# Altium PCB PCB1.PcbDoc (part 4 of 6)
Units mm, origin at the board's own origin, x right, y up, seen from the top; angles counter-clockwise.
Board outline 1473.2 x 504.06 mm, 4 copper layers (Top Layer, MidLayer1, MidLayer2, Bottom Layer); 162 components, 222 nets, 4894 pads, 2213 vias.
Unrouted connection lines stored in the file: 216.
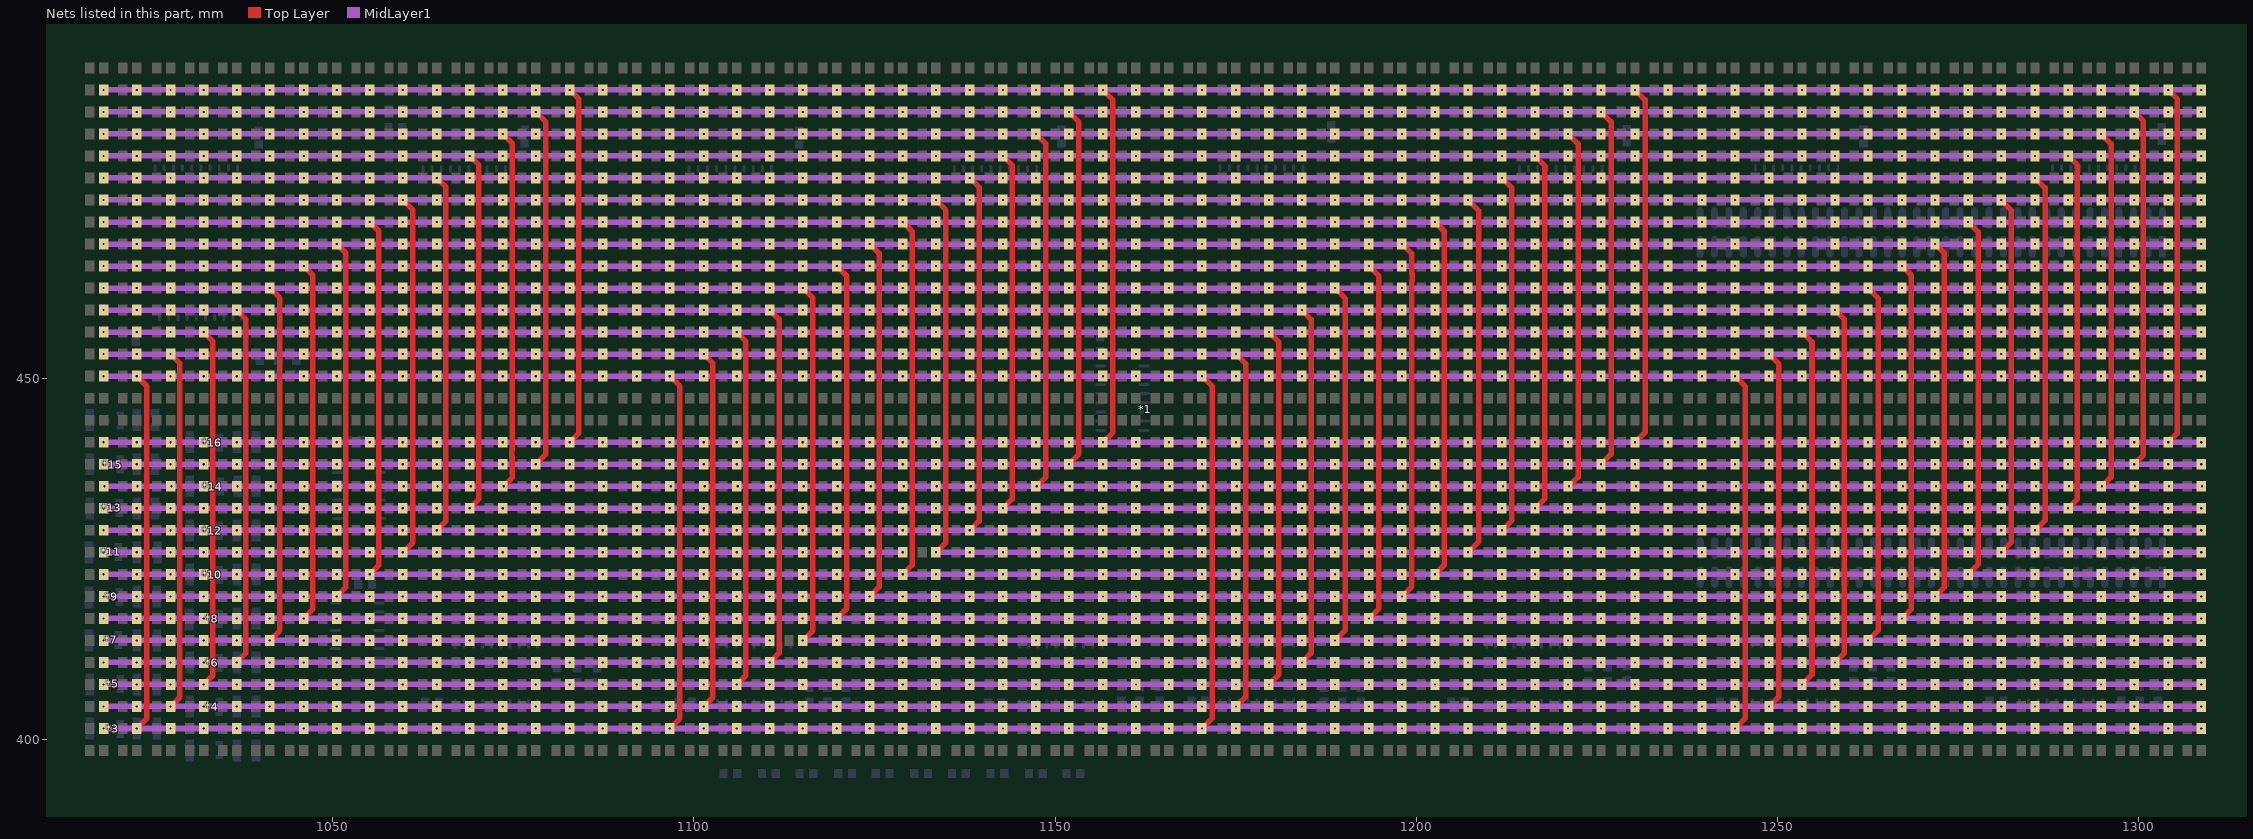
[diagram p6: the nets of this part, all layers, seen from the top]

## Via types
v1: diameter 0.508, hole 0.305, Top Layer to MidLayer1, 2032 vias
v2: diameter 0.508, hole 0.305, Top Layer to Bottom Layer, 143 vias
v3: diameter 0.508, hole 0.305, MidLayer2 to Bottom Layer, 38 vias

## Nets (pads, with @x,y where several pads share a name; then routed paths per layer and width w, separated by ;. In a path a pad name is that pad's centre, name@x,y a point inside that pad or via, vN(x,y) a via of type N, cw(c..) or ccw(c..) an arc to the next point about the centre after c; other vN are vias at no path point) (continued)
AOD1: *1.66 *3.1 | length 780.3
  Top Layer w0.762: v1(1022.863,401.574) 1024.255,402.966 1024.255,448.95 v1(1022.863,450.342) ; v1(1096.65,401.574) 1098.042,402.966 1098.042,448.95 v1(1096.65,450.342) ; v1(1170.31,401.574) 1171.702,402.966 1171.702,448.95 v1(1170.31,450.342) ; v1(1244.097,401.574) 1245.489,402.966 1245.489,448.95 v1(1244.097,450.342)
  MidLayer1 w0.762: v2(1018.286,401.574) v1(1022.863,401.574) v1(1027.562,401.574) v1(1032.134,401.574) v1(1036.701,401.574) v1(1041.278,401.574) v1(1045.977,401.574) v1(1050.549,401.574) v1(1055.116,401.574) v1(1059.693,401.574) v1(1064.392,401.574) v1(1068.964,401.574) v1(1073.531,401.574) v1(1078.108,401.574) v1(1082.807,401.574) v1(1087.379,401.574) v1(1092.073,401.574) v1(1096.65,401.574) v1(1101.349,401.574) v1(1105.921,401.574) v1(1110.488,401.574) v1(1115.065,401.574) v1(1119.764,401.574) v1(1124.336,401.574) v1(1128.903,401.574) v1(1133.48,401.574) v1(1138.179,401.574) v1(1142.751,401.574) v1(1147.318,401.574) v1(1151.895,401.574) v1(1156.594,401.574) v1(1161.166,401.574) v1(1165.733,401.574) v1(1170.31,401.574) v1(1175.009,401.574) v1(1179.581,401.574) v1(1184.148,401.574) v1(1188.725,401.574) v1(1193.424,401.574) v1(1197.996,401.574) v1(1202.563,401.574) v1(1207.14,401.574) v1(1211.839,401.574) v1(1216.411,401.574) v1(1220.978,401.574) v1(1225.555,401.574) v1(1230.254,401.574) v1(1234.826,401.574) v1(1239.52,401.574) v1(1244.097,401.574) v1(1248.796,401.574) v1(1253.368,401.574) v1(1257.935,401.574) v1(1262.512,401.574) v1(1267.211,401.574) v1(1271.783,401.574) v1(1276.35,401.574) v1(1280.927,401.574) v1(1285.626,401.574) v1(1290.198,401.574) v1(1294.765,401.574) v1(1299.342,401.574) v1(1304.041,401.574) v1(1308.613,401.574) ; v1(1018.286,450.342) v1(1022.863,450.342) v1(1027.562,450.342) v1(1032.134,450.342) v1(1036.701,450.342) v1(1041.278,450.342) v1(1045.977,450.342) v1(1050.549,450.342) v1(1055.116,450.342) v1(1059.693,450.342) v1(1064.392,450.342) v1(1068.964,450.342) v1(1073.531,450.342) v1(1078.108,450.342) v1(1082.807,450.342) v1(1087.379,450.342) v1(1092.073,450.342) v1(1096.65,450.342) v1(1101.349,450.342) v1(1105.921,450.342) v1(1110.488,450.342) v1(1115.065,450.342) v1(1119.764,450.342) v1(1124.336,450.342) v1(1128.903,450.342) v1(1133.48,450.342) v1(1138.179,450.342) v1(1142.751,450.342) v1(1147.318,450.342) v1(1151.895,450.342) v1(1156.594,450.342) v1(1161.166,450.342) v1(1165.733,450.342) v1(1170.31,450.342) v1(1175.009,450.342) v1(1179.581,450.342) v1(1184.148,450.342) v1(1188.725,450.342) v1(1193.424,450.342) v1(1197.996,450.342) v1(1202.563,450.342) v1(1207.14,450.342) v1(1211.839,450.342) v1(1216.411,450.342) v1(1220.978,450.342) v1(1225.555,450.342) v1(1230.254,450.342) v1(1234.826,450.342) v1(1239.52,450.342) v1(1244.097,450.342) v1(1248.796,450.342) v1(1253.368,450.342) v1(1257.935,450.342) v1(1262.512,450.342) v1(1267.211,450.342) v1(1271.783,450.342) v1(1276.35,450.342) v1(1280.927,450.342) v1(1285.626,450.342) v1(1290.198,450.342) v1(1294.765,450.342) v1(1299.342,450.342) v1(1304.041,450.342) v1(1308.613,450.342)
AOD2: *1.67 *4.1 | length 780.1
  Top Layer w0.762: v1(1027.562,404.622) 1028.837,405.897 1028.837,452.115 v1(1027.562,453.39) ; v1(1101.349,404.622) 1102.624,405.897 1102.624,452.115 v1(1101.349,453.39) ; v1(1175.009,404.622) 1176.386,405.999 1176.386,452.013 v1(1175.009,453.39) ; v1(1248.796,404.622) 1250.173,405.999 1250.173,452.013 v1(1248.796,453.39)
  MidLayer1 w0.762: v1(1018.286,404.622) v1(1022.863,404.622) v1(1027.562,404.622) v2(1032.134,404.622) v1(1036.701,404.622) v1(1041.278,404.622) v1(1045.977,404.622) v1(1050.549,404.622) v1(1055.116,404.622) v1(1059.693,404.622) v1(1064.392,404.622) v1(1068.964,404.622) v1(1073.531,404.622) v1(1078.108,404.622) v1(1082.807,404.622) v1(1087.379,404.622) v1(1092.073,404.622) v1(1096.65,404.622) v1(1101.349,404.622) v1(1105.921,404.622) v1(1110.488,404.622) v1(1115.065,404.622) v1(1119.764,404.622) v1(1124.336,404.622) v1(1128.903,404.622) v1(1133.48,404.622) v1(1138.179,404.622) v1(1142.751,404.622) v1(1147.318,404.622) v1(1151.895,404.622) v1(1156.594,404.622) v1(1161.166,404.622) v1(1165.733,404.622) v1(1170.31,404.622) v1(1175.009,404.622) v1(1179.581,404.622) v1(1184.148,404.622) v1(1188.725,404.622) v1(1193.424,404.622) v1(1197.996,404.622) v1(1202.563,404.622) v1(1207.14,404.622) v1(1211.839,404.622) v1(1216.411,404.622) v1(1220.978,404.622) v1(1225.555,404.622) v1(1230.254,404.622) v1(1234.826,404.622) v1(1239.52,404.622) v1(1244.097,404.622) v1(1248.796,404.622) v1(1253.368,404.622) v1(1257.935,404.622) v1(1262.512,404.622) v1(1267.211,404.622) v1(1271.783,404.622) v1(1276.35,404.622) v1(1280.927,404.622) v1(1285.626,404.622) v1(1290.198,404.622) v1(1294.765,404.622) v1(1299.342,404.622) v1(1304.041,404.622) v1(1308.613,404.622) ; v1(1018.286,453.39) v1(1022.863,453.39) v1(1027.562,453.39) v1(1032.134,453.39) v1(1036.701,453.39) v1(1041.278,453.39) v1(1045.977,453.39) v1(1050.549,453.39) v1(1055.116,453.39) v1(1059.693,453.39) v1(1064.392,453.39) v1(1068.964,453.39) v1(1073.531,453.39) v1(1078.108,453.39) v1(1082.807,453.39) v1(1087.379,453.39) v1(1092.073,453.39) v1(1096.65,453.39) v1(1101.349,453.39) v1(1105.921,453.39) v1(1110.488,453.39) v1(1115.065,453.39) v1(1119.764,453.39) v1(1124.336,453.39) v1(1128.903,453.39) v1(1133.48,453.39) v1(1138.179,453.39) v1(1142.751,453.39) v1(1147.318,453.39) v1(1151.895,453.39) v1(1156.594,453.39) v1(1161.166,453.39) v1(1165.733,453.39) v1(1170.31,453.39) v1(1175.009,453.39) v1(1179.581,453.39) v1(1184.148,453.39) v1(1188.725,453.39) v1(1193.424,453.39) v1(1197.996,453.39) v1(1202.563,453.39) v1(1207.14,453.39) v1(1211.839,453.39) v1(1216.411,453.39) v1(1220.978,453.39) v1(1225.555,453.39) v1(1230.254,453.39) v1(1234.826,453.39) v1(1239.52,453.39) v1(1244.097,453.39) v1(1248.796,453.39) v1(1253.368,453.39) v1(1257.935,453.39) v1(1262.512,453.39) v1(1267.211,453.39) v1(1271.783,453.39) v1(1276.35,453.39) v1(1280.927,453.39) v1(1285.626,453.39) v1(1290.198,453.39) v1(1294.765,453.39) v1(1299.342,453.39) v1(1304.041,453.39) v1(1308.613,453.39)
AOD3: *1.68 *5.1 | length 780.1
  Top Layer w0.762: v1(1032.134,407.67) 1033.409,408.945 1033.409,455.163 v1(1032.134,456.438) ; v1(1105.921,407.67) 1107.196,408.945 1107.196,455.163 v1(1105.921,456.438) ; v1(1179.581,407.67) 1180.958,409.047 1180.958,455.061 v1(1179.581,456.438) ; v1(1253.368,407.67) 1254.745,409.047 1254.745,455.061 v1(1253.368,456.438)
  MidLayer1 w0.762: v2(1018.286,407.67) v1(1022.863,407.67) v1(1027.562,407.67) v1(1032.134,407.67) v1(1036.701,407.67) v1(1041.278,407.67) v1(1045.977,407.67) v1(1050.549,407.67) v1(1055.116,407.67) v1(1059.693,407.67) v1(1064.392,407.67) v1(1068.964,407.67) v1(1073.531,407.67) v1(1078.108,407.67) v1(1082.807,407.67) v1(1087.379,407.67) v1(1092.073,407.67) v1(1096.65,407.67) v1(1101.349,407.67) v1(1105.921,407.67) v1(1110.488,407.67) v1(1115.065,407.67) v1(1119.764,407.67) v1(1124.336,407.67) v1(1128.903,407.67) v1(1133.48,407.67) v1(1138.179,407.67) v1(1142.751,407.67) v1(1147.318,407.67) v1(1151.895,407.67) v1(1156.594,407.67) v1(1161.166,407.67) v1(1165.733,407.67) v1(1170.31,407.67) v1(1175.009,407.67) v1(1179.581,407.67) v1(1184.148,407.67) v1(1188.725,407.67) v1(1193.424,407.67) v1(1197.996,407.67) v1(1202.563,407.67) v1(1207.14,407.67) v1(1211.839,407.67) v1(1216.411,407.67) v1(1220.978,407.67) v1(1225.555,407.67) v1(1230.254,407.67) v1(1234.826,407.67) v1(1239.52,407.67) v1(1244.097,407.67) v1(1248.796,407.67) v1(1253.368,407.67) v1(1257.935,407.67) v1(1262.512,407.67) v1(1267.211,407.67) v1(1271.783,407.67) v1(1276.35,407.67) v1(1280.927,407.67) v1(1285.626,407.67) v1(1290.198,407.67) v1(1294.765,407.67) v1(1299.342,407.67) v1(1304.041,407.67) v1(1308.613,407.67) ; v1(1018.286,456.438) v1(1022.863,456.438) v1(1027.562,456.438) v1(1032.134,456.438) v1(1036.701,456.438) v1(1041.278,456.438) v1(1045.977,456.438) v1(1050.549,456.438) v1(1055.116,456.438) v1(1059.693,456.438) v1(1064.392,456.438) v1(1068.964,456.438) v1(1073.531,456.438) v1(1078.108,456.438) v1(1082.807,456.438) v1(1087.379,456.438) v1(1092.073,456.438) v1(1096.65,456.438) v1(1101.349,456.438) v1(1105.921,456.438) v1(1110.488,456.438) v1(1115.065,456.438) v1(1119.764,456.438) v1(1124.336,456.438) v1(1128.903,456.438) v1(1133.48,456.438) v1(1138.179,456.438) v1(1142.751,456.438) v1(1147.318,456.438) v1(1151.895,456.438) v1(1156.594,456.438) v1(1161.166,456.438) v1(1165.733,456.438) v1(1170.31,456.438) v1(1175.009,456.438) v1(1179.581,456.438) v1(1184.148,456.438) v1(1188.725,456.438) v1(1193.424,456.438) v1(1197.996,456.438) v1(1202.563,456.438) v1(1207.14,456.438) v1(1211.839,456.438) v1(1216.411,456.438) v1(1220.978,456.438) v1(1225.555,456.438) v1(1230.254,456.438) v1(1234.826,456.438) v1(1239.52,456.438) v1(1244.097,456.438) v1(1248.796,456.438) v1(1253.368,456.438) v1(1257.935,456.438) v1(1262.512,456.438) v1(1267.211,456.438) v1(1271.783,456.438) v1(1276.35,456.438) v1(1280.927,456.438) v1(1285.626,456.438) v1(1290.198,456.438) v1(1294.765,456.438) v1(1299.342,456.438) v1(1304.041,456.438) v1(1308.613,456.438)
AOD4: *1.69 *6.1 | length 780
  Top Layer w0.762: v1(1036.701,410.718) 1037.981,411.998 1037.981,458.206 v1(1036.701,459.486) ; v1(1110.488,410.718) 1111.768,411.998 1111.768,458.206 v1(1110.488,459.486) ; v1(1184.148,410.718) 1185.428,411.998 1185.428,458.206 v1(1184.148,459.486) ; v1(1257.935,410.718) 1259.215,411.998 1259.215,458.206 v1(1257.935,459.486)
  MidLayer1 w0.762: v1(1018.286,410.718) v1(1022.863,410.718) v1(1027.562,410.718) v2(1032.134,410.718) v1(1036.701,410.718) v1(1041.278,410.718) v1(1045.977,410.718) v1(1050.549,410.718) v1(1055.116,410.718) v1(1059.693,410.718) v1(1064.392,410.718) v1(1068.964,410.718) v1(1073.531,410.718) v1(1078.108,410.718) v1(1082.807,410.718) v1(1087.379,410.718) v1(1092.073,410.718) v1(1096.65,410.718) v1(1101.349,410.718) v1(1105.921,410.718) v1(1110.488,410.718) v1(1115.065,410.718) v1(1119.764,410.718) v1(1124.336,410.718) v1(1128.903,410.718) v1(1133.48,410.718) v1(1138.179,410.718) v1(1142.751,410.718) v1(1147.318,410.718) v1(1151.895,410.718) v1(1156.594,410.718) v1(1161.166,410.718) v1(1165.733,410.718) v1(1170.31,410.718) v1(1175.009,410.718) v1(1179.581,410.718) v1(1184.148,410.718) v1(1188.725,410.718) v1(1193.424,410.718) v1(1197.996,410.718) v1(1202.563,410.718) v1(1207.14,410.718) v1(1211.839,410.718) v1(1216.411,410.718) v1(1220.978,410.718) v1(1225.555,410.718) v1(1230.254,410.718) v1(1234.826,410.718) v1(1239.52,410.718) v1(1244.097,410.718) v1(1248.796,410.718) v1(1253.368,410.718) v1(1257.935,410.718) v1(1262.512,410.718) v1(1267.211,410.718) v1(1271.783,410.718) v1(1276.35,410.718) v1(1280.927,410.718) v1(1285.626,410.718) v1(1290.198,410.718) v1(1294.765,410.718) v1(1299.342,410.718) v1(1304.041,410.718) v1(1308.613,410.718) ; v1(1018.286,459.486) v1(1022.863,459.486) v1(1027.562,459.486) v1(1032.134,459.486) v1(1036.701,459.486) v1(1041.278,459.486) v1(1045.977,459.486) v1(1050.549,459.486) v1(1055.116,459.486) v1(1059.693,459.486) v1(1064.392,459.486) v1(1068.964,459.486) v1(1073.531,459.486) v1(1078.108,459.486) v1(1082.807,459.486) v1(1087.379,459.486) v1(1092.073,459.486) v1(1096.65,459.486) v1(1101.349,459.486) v1(1105.921,459.486) v1(1110.488,459.486) v1(1115.065,459.486) v1(1119.764,459.486) v1(1124.336,459.486) v1(1128.903,459.486) v1(1133.48,459.486) v1(1138.179,459.486) v1(1142.751,459.486) v1(1147.318,459.486) v1(1151.895,459.486) v1(1156.594,459.486) v1(1161.166,459.486) v1(1165.733,459.486) v1(1170.31,459.486) v1(1175.009,459.486) v1(1179.581,459.486) v1(1184.148,459.486) v1(1188.725,459.486) v1(1193.424,459.486) v1(1197.996,459.486) v1(1202.563,459.486) v1(1207.14,459.486) v1(1211.839,459.486) v1(1216.411,459.486) v1(1220.978,459.486) v1(1225.555,459.486) v1(1230.254,459.486) v1(1234.826,459.486) v1(1239.52,459.486) v1(1244.097,459.486) v1(1248.796,459.486) v1(1253.368,459.486) v1(1257.935,459.486) v1(1262.512,459.486) v1(1267.211,459.486) v1(1271.783,459.486) v1(1276.35,459.486) v1(1280.927,459.486) v1(1285.626,459.486) v1(1290.198,459.486) v1(1294.765,459.486) v1(1299.342,459.486) v1(1304.041,459.486) v1(1308.613,459.486)
AOD5: *1.70 *7.1 | length 775.8
  Top Layer w0.762: v1(1041.278,413.766) 1042.67,415.158 1042.67,461.132 *1.70@1041.268,462.534 v1(1041.278,462.534) ; v1(1115.065,413.766) 1116.457,415.158 1116.457,461.142 v1(1115.065,462.534) ; v1(1188.725,413.766) 1190.117,415.158 1190.117,461.142 v1(1188.725,462.534) ; v1(1262.512,413.766) 1263.904,415.158 1263.904,461.142 v1(1262.512,462.534)
  MidLayer1 w0.762: v2(1018.286,413.766) v1(1022.863,413.766) v1(1027.562,413.766) v1(1032.134,413.766) v1(1036.701,413.766) v1(1041.278,413.766) v1(1045.977,413.766) v1(1050.549,413.766) v1(1055.116,413.766) v1(1059.693,413.766) v1(1064.392,413.766) v1(1068.964,413.766) v1(1073.531,413.766) v1(1078.108,413.766) v1(1082.807,413.766) v1(1087.379,413.766) v1(1092.073,413.766) v1(1096.65,413.766) v1(1101.349,413.766) v1(1105.921,413.766) v1(1110.488,413.766) ; v1(1018.286,462.534) v1(1022.863,462.534) v1(1027.562,462.534) v1(1032.134,462.534) v1(1036.701,462.534) v1(1041.278,462.534) v1(1045.977,462.534) v1(1050.549,462.534) v1(1055.116,462.534) v1(1059.693,462.534) v1(1064.392,462.534) v1(1068.964,462.534) v1(1073.531,462.534) v1(1078.108,462.534) v1(1082.807,462.534) v1(1087.379,462.534) v1(1092.073,462.534) v1(1096.65,462.534) v1(1101.349,462.534) v1(1105.921,462.534) v1(1110.488,462.534) v1(1115.065,462.534) v1(1119.764,462.534) v1(1124.336,462.534) v1(1128.903,462.534) v1(1133.48,462.534) v1(1138.179,462.534) v1(1142.751,462.534) v1(1147.318,462.534) v1(1151.895,462.534) v1(1156.594,462.534) v1(1161.166,462.534) v1(1165.733,462.534) v1(1170.31,462.534) v1(1175.009,462.534) v1(1179.581,462.534) v1(1184.148,462.534) v1(1188.725,462.534) v1(1193.424,462.534) v1(1197.996,462.534) v1(1202.563,462.534) v1(1207.14,462.534) v1(1211.839,462.534) v1(1216.411,462.534) v1(1220.978,462.534) v1(1225.555,462.534) v1(1230.254,462.534) v1(1234.826,462.534) v1(1239.52,462.534) v1(1244.097,462.534) v1(1248.796,462.534) v1(1253.368,462.534) v1(1257.935,462.534) v1(1262.512,462.534) v1(1267.211,462.534) v1(1271.783,462.534) v1(1276.35,462.534) v1(1280.927,462.534) v1(1285.626,462.534) v1(1290.198,462.534) v1(1294.765,462.534) v1(1299.342,462.534) v1(1304.041,462.534) v1(1308.613,462.534) ; v1(1115.065,413.766) v1(1119.764,413.766) v1(1124.336,413.766) v1(1128.903,413.766) v1(1133.48,413.766) v1(1138.179,413.766) v1(1142.751,413.766) v1(1147.318,413.766) v1(1151.895,413.766) v1(1156.594,413.766) v1(1161.166,413.766) v1(1165.733,413.766) v1(1170.31,413.766) v1(1175.009,413.766) v1(1179.581,413.766) v1(1184.148,413.766) v1(1188.725,413.766) v1(1193.424,413.766) v1(1197.996,413.766) v1(1202.563,413.766) v1(1207.14,413.766) v1(1211.839,413.766) v1(1216.411,413.766) v1(1220.978,413.766) v1(1225.555,413.766) v1(1230.254,413.766) v1(1234.826,413.766) v1(1239.52,413.766) v1(1244.097,413.766) v1(1248.796,413.766) v1(1253.368,413.766) v1(1257.935,413.766) v1(1262.512,413.766) v1(1267.211,413.766) v1(1271.783,413.766) v1(1276.35,413.766) v1(1280.927,413.766) v1(1285.626,413.766) v1(1290.198,413.766) v1(1294.765,413.766) v1(1299.342,413.766) v1(1304.041,413.766) v1(1308.613,413.766)
AOD6: *1.71 *8.1 | length 780.1
  Top Layer w0.762: v1(1045.977,416.814) 1047.252,418.089 1047.252,464.307 v1(1045.977,465.582) ; v1(1119.764,416.814) 1121.141,418.191 1121.141,464.205 v1(1119.764,465.582) ; v1(1193.424,416.814) 1194.801,418.191 1194.801,464.205 v1(1193.424,465.582) ; v1(1267.211,416.814) 1268.486,418.089 1268.486,464.307 v1(1267.211,465.582)
  MidLayer1 w0.762: v1(1018.286,416.814) v1(1022.863,416.814) v1(1027.562,416.814) v2(1032.134,416.814) v1(1036.701,416.814) v1(1041.278,416.814) v1(1045.977,416.814) v1(1050.549,416.814) v1(1055.116,416.814) v1(1059.693,416.814) v1(1064.392,416.814) v1(1068.964,416.814) v1(1073.531,416.814) v1(1078.108,416.814) v1(1082.807,416.814) v1(1087.379,416.814) v1(1092.073,416.814) v1(1096.65,416.814) v1(1101.349,416.814) v1(1105.921,416.814) v1(1110.488,416.814) v1(1115.065,416.814) v1(1119.764,416.814) v1(1124.336,416.814) v1(1128.903,416.814) v1(1133.48,416.814) v1(1138.179,416.814) v1(1142.751,416.814) v1(1147.318,416.814) v1(1151.895,416.814) v1(1156.594,416.814) v1(1161.166,416.814) v1(1165.733,416.814) v1(1170.31,416.814) v1(1175.009,416.814) v1(1179.581,416.814) v1(1184.148,416.814) v1(1188.725,416.814) v1(1193.424,416.814) v1(1197.996,416.814) v1(1202.563,416.814) v1(1207.14,416.814) v1(1211.839,416.814) v1(1216.411,416.814) v1(1220.978,416.814) v1(1225.555,416.814) v1(1230.254,416.814) v1(1234.826,416.814) v1(1239.52,416.814) v1(1244.097,416.814) v1(1248.796,416.814) v1(1253.368,416.814) v1(1257.935,416.814) v1(1262.512,416.814) v1(1267.211,416.814) v1(1271.783,416.814) v1(1276.35,416.814) v1(1280.927,416.814) v1(1285.626,416.814) v1(1290.198,416.814) v1(1294.765,416.814) v1(1299.342,416.814) v1(1304.041,416.814) v1(1308.613,416.814) ; v1(1018.286,465.582) v1(1022.863,465.582) v1(1027.562,465.582) v1(1032.134,465.582) v1(1036.701,465.582) v1(1041.278,465.582) v1(1045.977,465.582) v1(1050.549,465.582) v1(1055.116,465.582) v1(1059.693,465.582) v1(1064.392,465.582) v1(1068.964,465.582) v1(1073.531,465.582) v1(1078.108,465.582) v1(1082.807,465.582) v1(1087.379,465.582) v1(1092.073,465.582) v1(1096.65,465.582) v1(1101.349,465.582) v1(1105.921,465.582) v1(1110.488,465.582) v1(1115.065,465.582) v1(1119.764,465.582) v1(1124.336,465.582) v1(1128.903,465.582) v1(1133.48,465.582) v1(1138.179,465.582) v1(1142.751,465.582) v1(1147.318,465.582) v1(1151.895,465.582) v1(1156.594,465.582) v1(1161.166,465.582) v1(1165.733,465.582) v1(1170.31,465.582) v1(1175.009,465.582) v1(1179.581,465.582) v1(1184.148,465.582) v1(1188.725,465.582) v1(1193.424,465.582) v1(1197.996,465.582) v1(1202.563,465.582) v1(1207.14,465.582) v1(1211.839,465.582) v1(1216.411,465.582) v1(1220.978,465.582) v1(1225.555,465.582) v1(1230.254,465.582) v1(1234.826,465.582) v1(1239.52,465.582) v1(1244.097,465.582) v1(1248.796,465.582) v1(1253.368,465.582) v1(1257.935,465.582) v1(1262.512,465.582) v1(1267.211,465.582) v1(1271.783,465.582) v1(1276.35,465.582) v1(1280.927,465.582) v1(1285.626,465.582) v1(1290.198,465.582) v1(1294.765,465.582) v1(1299.342,465.582) v1(1304.041,465.582) v1(1308.613,465.582)
AOD7: *1.72 *9.1 | length 780
  Top Layer w0.762: v1(1050.549,419.862) 1051.824,421.137 1051.824,467.355 v1(1050.549,468.63) ; v1(1124.336,419.862) 1125.611,421.137 1125.611,467.355 v1(1124.336,468.63) ; v1(1197.996,419.862) 1199.373,421.239 1199.373,463.547 1199.388,463.562 1199.388,464.539 1199.373,464.554 1199.373,467.253 v1(1197.996,468.63) ; v1(1271.783,419.862) 1273.058,421.137 1273.058,467.355 v1(1271.783,468.63)
  MidLayer1 w0.762: v2(1018.286,419.862) v1(1022.863,419.862) v1(1027.562,419.862) v1(1032.134,419.862) v1(1036.701,419.862) v1(1041.278,419.862) v1(1045.977,419.862) v1(1050.549,419.862) v1(1055.116,419.862) v1(1059.693,419.862) v1(1064.392,419.862) v1(1068.964,419.862) v1(1073.531,419.862) v1(1078.108,419.862) v1(1082.807,419.862) v1(1087.379,419.862) v1(1092.073,419.862) v1(1096.65,419.862) v1(1101.349,419.862) v1(1105.921,419.862) v1(1110.488,419.862) v1(1115.065,419.862) v1(1119.764,419.862) v1(1124.336,419.862) v1(1128.903,419.862) v1(1133.48,419.862) v1(1138.179,419.862) v1(1142.751,419.862) v1(1147.318,419.862) v1(1151.895,419.862) v1(1156.594,419.862) v1(1161.166,419.862) v1(1165.733,419.862) v1(1170.31,419.862) v1(1175.009,419.862) v1(1179.581,419.862) v1(1184.148,419.862) v1(1188.725,419.862) v1(1193.424,419.862) v1(1197.996,419.862) v1(1202.563,419.862) v1(1207.14,419.862) v1(1211.839,419.862) v1(1216.411,419.862) v1(1220.978,419.862) v1(1225.555,419.862) v1(1230.254,419.862) v1(1234.826,419.862) v1(1239.52,419.862) v1(1244.097,419.862) v1(1248.796,419.862) v1(1253.368,419.862) v1(1257.935,419.862) v1(1262.512,419.862) v1(1267.211,419.862) v1(1271.783,419.862) v1(1276.35,419.862) v1(1280.927,419.862) v1(1285.626,419.862) v1(1290.198,419.862) v1(1294.765,419.862) v1(1299.342,419.862) v1(1304.041,419.862) v1(1308.613,419.862) ; v1(1018.286,468.63) v1(1022.863,468.63) v1(1027.562,468.63) v1(1032.134,468.63) v1(1036.701,468.63) v1(1041.278,468.63) v1(1045.977,468.63) v1(1050.549,468.63) v1(1055.116,468.63) v1(1059.693,468.63) v1(1064.392,468.63) v1(1068.964,468.63) v1(1073.531,468.63) v1(1078.108,468.63) v1(1082.807,468.63) v1(1087.379,468.63) v1(1092.073,468.63) v1(1096.65,468.63) v1(1101.349,468.63) v1(1105.921,468.63) v1(1110.488,468.63) v1(1115.065,468.63) v1(1119.764,468.63) v1(1124.336,468.63) v1(1128.903,468.63) v1(1133.48,468.63) v1(1138.179,468.63) v1(1142.751,468.63) v1(1147.318,468.63) v1(1151.895,468.63) v1(1156.594,468.63) v1(1161.166,468.63) v1(1165.733,468.63) v1(1170.31,468.63) v1(1175.009,468.63) v1(1179.581,468.63) v1(1184.148,468.63) v1(1188.725,468.63) v1(1193.424,468.63) v1(1197.996,468.63) v1(1202.563,468.63) v1(1207.14,468.63) v1(1211.839,468.63) v1(1216.411,468.63) v1(1220.978,468.63) v1(1225.555,468.63) v1(1230.254,468.63) v1(1234.826,468.63) v1(1239.52,468.63) v1(1244.097,468.63) v1(1248.796,468.63) v1(1253.368,468.63) v1(1257.935,468.63) v1(1262.512,468.63) v1(1267.211,468.63) v1(1271.783,468.63) v1(1276.35,468.63) v1(1280.927,468.63) v1(1285.626,468.63) v1(1290.198,468.63) v1(1294.765,468.63) v1(1299.342,468.63) v1(1304.041,468.63) v1(1308.613,468.63)
AOD8: *1.73 *10.1 | length 780.1
  Top Layer w0.762: v1(1055.116,422.91) 1056.396,424.19 1056.396,470.398 v1(1055.116,471.678) ; v1(1128.903,422.91) 1130.183,424.19 1130.183,470.398 v1(1128.903,471.678) ; v1(1202.563,422.91) 1203.843,424.19 1203.843,470.398 v1(1202.563,471.678) ; v1(1276.35,422.91) 1277.732,424.292 1277.732,470.296 v1(1276.35,471.678)
  MidLayer1 w0.762: v1(1018.286,422.91) v1(1022.863,422.91) v1(1027.562,422.91) v2(1032.134,422.91) v1(1036.701,422.91) v1(1041.278,422.91) v1(1045.977,422.91) v1(1050.549,422.91) v1(1055.116,422.91) v1(1059.693,422.91) v1(1064.392,422.91) v1(1068.964,422.91) v1(1073.531,422.91) v1(1078.108,422.91) v1(1082.807,422.91) v1(1087.379,422.91) v1(1092.073,422.91) v1(1096.65,422.91) v1(1101.349,422.91) v1(1105.921,422.91) v1(1110.488,422.91) v1(1115.065,422.91) v1(1119.764,422.91) v1(1124.336,422.91) v1(1128.903,422.91) v1(1133.48,422.91) v1(1138.179,422.91) v1(1142.751,422.91) v1(1147.318,422.91) v1(1151.895,422.91) v1(1156.594,422.91) v1(1161.166,422.91) v1(1165.733,422.91) v1(1170.31,422.91) v1(1175.009,422.91) v1(1179.581,422.91) v1(1184.148,422.91) v1(1188.725,422.91) v1(1193.424,422.91) v1(1197.996,422.91) v1(1202.563,422.91) v1(1207.14,422.91) v1(1211.839,422.91) v1(1216.411,422.91) v1(1220.978,422.91) v1(1225.555,422.91) v1(1230.254,422.91) v1(1234.826,422.91) v1(1239.52,422.91) v1(1244.097,422.91) v1(1248.796,422.91) v1(1253.368,422.91) v1(1257.935,422.91) v1(1262.512,422.91) v1(1267.211,422.91) v1(1271.783,422.91) v1(1276.35,422.91) v1(1280.927,422.91) v1(1285.626,422.91) v1(1290.198,422.91) v1(1294.765,422.91) v1(1299.342,422.91) v1(1304.041,422.91) v1(1308.613,422.91) ; v1(1018.286,471.678) v1(1022.863,471.678) v1(1027.562,471.678) v1(1032.134,471.678) v1(1036.701,471.678) v1(1041.278,471.678) v1(1045.977,471.678) v1(1050.549,471.678) v1(1055.116,471.678) v1(1059.693,471.678) v1(1064.392,471.678) v1(1068.964,471.678) v1(1073.531,471.678) v1(1078.108,471.678) v1(1082.807,471.678) v1(1087.379,471.678) v1(1092.073,471.678) v1(1096.65,471.678) v1(1101.349,471.678) v1(1105.921,471.678) v1(1110.488,471.678) v1(1115.065,471.678) v1(1119.764,471.678) v1(1124.336,471.678) v1(1128.903,471.678) v1(1133.48,471.678) v1(1138.179,471.678) v1(1142.751,471.678) v1(1147.318,471.678) v1(1151.895,471.678) v1(1156.594,471.678) v1(1161.166,471.678) v1(1165.733,471.678) v1(1170.31,471.678) v1(1175.009,471.678) v1(1179.581,471.678) v1(1184.148,471.678) v1(1188.725,471.678) v1(1193.424,471.678) v1(1197.996,471.678) v1(1202.563,471.678) v1(1207.14,471.678) v1(1211.839,471.678) v1(1216.411,471.678) v1(1220.978,471.678) v1(1225.555,471.678) v1(1230.254,471.678) v1(1234.826,471.678) v1(1239.52,471.678) v1(1244.097,471.678) v1(1248.796,471.678) v1(1253.368,471.678) v1(1257.935,471.678) v1(1262.512,471.678) v1(1267.211,471.678) v1(1271.783,471.678) v1(1276.35,471.678) v1(1280.927,471.678) v1(1285.626,471.678) v1(1290.198,471.678) v1(1294.765,471.678) v1(1299.342,471.678) v1(1304.041,471.678) v1(1308.613,471.678)
AOD9: *1.74 *11.1 | length 775.9
  Top Layer w0.762: v1(1059.693,425.958) 1061.085,427.35 1061.085,473.324 *1.74@1059.683,474.726 v1(1059.693,474.726) ; v1(1133.48,425.958) 1134.872,427.35 1134.872,473.334 v1(1133.48,474.726) ; v1(1207.14,425.958) 1208.644,427.462 1208.644,473.222 v1(1207.14,474.726) ; v1(1280.927,425.958) 1282.319,427.35 1282.319,473.334 v1(1280.927,474.726)
  MidLayer1 w0.762: v2(1018.286,425.958) v1(1022.863,425.958) v1(1027.562,425.958) v1(1032.134,425.958) v1(1036.701,425.958) v1(1041.278,425.958) v1(1045.977,425.958) v1(1050.549,425.958) v1(1055.116,425.958) v1(1059.693,425.958) v1(1064.392,425.958) v1(1068.964,425.958) v1(1073.531,425.958) v1(1078.108,425.958) v1(1082.807,425.958) v1(1087.379,425.958) v1(1092.073,425.958) v1(1096.65,425.958) v1(1101.349,425.958) v1(1105.921,425.958) v1(1110.488,425.958) v1(1115.065,425.958) v1(1119.764,425.958) v1(1124.336,425.958) v1(1128.903,425.958) ; v1(1018.286,474.726) v1(1022.863,474.726) v1(1027.562,474.726) v1(1032.134,474.726) v1(1036.701,474.726) v1(1041.278,474.726) v1(1045.977,474.726) v1(1050.549,474.726) v1(1055.116,474.726) v1(1059.693,474.726) v1(1064.392,474.726) v1(1068.964,474.726) v1(1073.531,474.726) v1(1078.108,474.726) v1(1082.807,474.726) v1(1087.379,474.726) v1(1092.073,474.726) v1(1096.65,474.726) v1(1101.349,474.726) v1(1105.921,474.726) v1(1110.488,474.726) v1(1115.065,474.726) v1(1119.764,474.726) v1(1124.336,474.726) v1(1128.903,474.726) v1(1133.48,474.726) v1(1138.179,474.726) v1(1142.751,474.726) v1(1147.318,474.726) v1(1151.895,474.726) v1(1156.594,474.726) v1(1161.166,474.726) v1(1165.733,474.726) v1(1170.31,474.726) v1(1175.009,474.726) v1(1179.581,474.726) v1(1184.148,474.726) v1(1188.725,474.726) v1(1193.424,474.726) v1(1197.996,474.726) v1(1202.563,474.726) v1(1207.14,474.726) v1(1211.839,474.726) v1(1216.411,474.726) v1(1220.978,474.726) v1(1225.555,474.726) v1(1230.254,474.726) v1(1234.826,474.726) v1(1239.52,474.726) v1(1244.097,474.726) v1(1248.796,474.726) v1(1253.368,474.726) v1(1257.935,474.726) v1(1262.512,474.726) v1(1267.211,474.726) v1(1271.783,474.726) v1(1276.35,474.726) v1(1280.927,474.726) v1(1285.626,474.726) v1(1290.198,474.726) v1(1294.765,474.726) v1(1299.342,474.726) v1(1304.041,474.726) v1(1308.613,474.726) ; v1(1133.48,425.958) v1(1138.179,425.958) v1(1142.751,425.958) v1(1147.318,425.958) v1(1151.895,425.958) v1(1156.594,425.958) v1(1161.166,425.958) v1(1165.733,425.958) v1(1170.31,425.958) v1(1175.009,425.958) v1(1179.581,425.958) v1(1184.148,425.958) v1(1188.725,425.958) v1(1193.424,425.958) v1(1197.996,425.958) v1(1202.563,425.958) v1(1207.14,425.958) v1(1211.839,425.958) v1(1216.411,425.958) v1(1220.978,425.958) v1(1225.555,425.958) v1(1230.254,425.958) v1(1234.826,425.958) v1(1239.52,425.958) v1(1244.097,425.958) v1(1248.796,425.958) v1(1253.368,425.958) v1(1257.935,425.958) v1(1262.512,425.958) v1(1267.211,425.958) v1(1271.783,425.958) v1(1276.35,425.958) v1(1280.927,425.958) v1(1285.626,425.958) v1(1290.198,425.958) v1(1294.765,425.958) v1(1299.342,425.958) v1(1304.041,425.958) v1(1308.613,425.958)
AOD10: *1.75 *12.1 | length 780.1
  Top Layer w0.762: v1(1064.392,429.006) 1065.667,430.281 1065.667,476.499 v1(1064.392,477.774) ; v1(1138.179,429.006) 1139.454,430.281 1139.454,476.499 v1(1138.179,477.774) ; v1(1211.839,429.006) 1213.216,430.383 1213.216,476.397 v1(1211.839,477.774) ; v1(1285.626,429.006) 1287.003,430.383 1287.003,476.397 v1(1285.626,477.774)
  MidLayer1 w0.762: v1(1018.286,429.006) v1(1022.863,429.006) v1(1027.562,429.006) v2(1032.134,429.006) v1(1036.701,429.006) v1(1041.278,429.006) v1(1045.977,429.006) v1(1050.549,429.006) v1(1055.116,429.006) v1(1059.693,429.006) v1(1064.392,429.006) v1(1068.964,429.006) v1(1073.531,429.006) v1(1078.108,429.006) v1(1082.807,429.006) v1(1087.379,429.006) v1(1092.073,429.006) v1(1096.65,429.006) v1(1101.349,429.006) v1(1105.921,429.006) v1(1110.488,429.006) v1(1115.065,429.006) v1(1119.764,429.006) v1(1124.336,429.006) v1(1128.903,429.006) v1(1133.48,429.006) v1(1138.179,429.006) v1(1142.751,429.006) v1(1147.318,429.006) v1(1151.895,429.006) v1(1156.594,429.006) v1(1161.166,429.006) v1(1165.733,429.006) v1(1170.31,429.006) v1(1175.009,429.006) v1(1179.581,429.006) v1(1184.148,429.006) v1(1188.725,429.006) v1(1193.424,429.006) v1(1197.996,429.006) v1(1202.563,429.006) v1(1207.14,429.006) v1(1211.839,429.006) v1(1216.411,429.006) v1(1220.978,429.006) v1(1225.555,429.006) v1(1230.254,429.006) v1(1234.826,429.006) v1(1239.52,429.006) v1(1244.097,429.006) v1(1248.796,429.006) v1(1253.368,429.006) v1(1257.935,429.006) v1(1262.512,429.006) v1(1267.211,429.006) v1(1271.783,429.006) v1(1276.35,429.006) v1(1280.927,429.006) v1(1285.626,429.006) v1(1290.198,429.006) v1(1294.765,429.006) v1(1299.342,429.006) v1(1304.041,429.006) v1(1308.613,429.006) ; v1(1018.286,477.774) v1(1022.863,477.774) v1(1027.562,477.774) v1(1032.134,477.774) v1(1036.701,477.774) v1(1041.278,477.774) v1(1045.977,477.774) v1(1050.549,477.774) v1(1055.116,477.774) v1(1059.693,477.774) v1(1064.392,477.774) v1(1068.964,477.774) v1(1073.531,477.774) v1(1078.108,477.774) v1(1082.807,477.774) v1(1087.379,477.774) v1(1092.073,477.774) v1(1096.65,477.774) v1(1101.349,477.774) v1(1105.921,477.774) v1(1110.488,477.774) v1(1115.065,477.774) v1(1119.764,477.774) v1(1124.336,477.774) v1(1128.903,477.774) v1(1133.48,477.774) v1(1138.179,477.774) v1(1142.751,477.774) v1(1147.318,477.774) v1(1151.895,477.774) v1(1156.594,477.774) v1(1161.166,477.774) v1(1165.733,477.774) v1(1170.31,477.774) v1(1175.009,477.774) v1(1179.581,477.774) v1(1184.148,477.774) v1(1188.725,477.774) v1(1193.424,477.774) v1(1197.996,477.774) v1(1202.563,477.774) v1(1207.14,477.774) v1(1211.839,477.774) v1(1216.411,477.774) v1(1220.978,477.774) v1(1225.555,477.774) v1(1230.254,477.774) v1(1234.826,477.774) v1(1239.52,477.774) v1(1244.097,477.774) v1(1248.796,477.774) v1(1253.368,477.774) v1(1257.935,477.774) v1(1262.512,477.774) v1(1267.211,477.774) v1(1271.783,477.774) v1(1276.35,477.774) v1(1280.927,477.774) v1(1285.626,477.774) v1(1290.198,477.774) v1(1294.765,477.774) v1(1299.342,477.774) v1(1304.041,477.774) v1(1308.613,477.774)
AOD11: *1.76 *13.1 | length 780
  Top Layer w0.762: v1(1068.964,432.054) 1070.239,433.329 1070.239,475.739 1070.229,475.749 1070.229,476.741 1070.239,476.751 1070.239,479.547 v1(1068.964,480.822) ; v1(1142.751,432.054) 1144.026,433.329 1144.026,479.547 v1(1142.751,480.822) ; v1(1216.411,432.054) 1217.788,433.431 1217.788,479.445 v1(1216.411,480.822) ; v1(1290.198,432.054) 1291.473,433.329 1291.473,479.547 v1(1290.198,480.822)
  MidLayer1 w0.762: v2(1018.286,432.054) v1(1022.863,432.054) v1(1027.562,432.054) v1(1032.134,432.054) v1(1036.701,432.054) v1(1041.278,432.054) v1(1045.977,432.054) v1(1050.549,432.054) v1(1055.116,432.054) v1(1059.693,432.054) v1(1064.392,432.054) v1(1068.964,432.054) v1(1073.531,432.054) v1(1078.108,432.054) v1(1082.807,432.054) v1(1087.379,432.054) v1(1092.073,432.054) v1(1096.65,432.054) v1(1101.349,432.054) v1(1105.921,432.054) v1(1110.488,432.054) v1(1115.065,432.054) v1(1119.764,432.054) v1(1124.336,432.054) v1(1128.903,432.054) v1(1133.48,432.054) v1(1138.179,432.054) v1(1142.751,432.054) v1(1147.318,432.054) v1(1151.895,432.054) v1(1156.594,432.054) v1(1161.166,432.054) v1(1165.733,432.054) v1(1170.31,432.054) v1(1175.009,432.054) v1(1179.581,432.054) v1(1184.148,432.054) v1(1188.725,432.054) v1(1193.424,432.054) v1(1197.996,432.054) v1(1202.563,432.054) v1(1207.14,432.054) v1(1211.839,432.054) v1(1216.411,432.054) v1(1220.978,432.054) v1(1225.555,432.054) v1(1230.254,432.054) v1(1234.826,432.054) v1(1239.52,432.054) v1(1244.097,432.054) v1(1248.796,432.054) v1(1253.368,432.054) v1(1257.935,432.054) v1(1262.512,432.054) v1(1267.211,432.054) v1(1271.783,432.054) v1(1276.35,432.054) v1(1280.927,432.054) v1(1285.626,432.054) v1(1290.198,432.054) v1(1294.765,432.054) v1(1299.342,432.054) v1(1304.041,432.054) v1(1308.613,432.054) ; v1(1018.286,480.822) v1(1022.863,480.822) v1(1027.562,480.822) v1(1032.134,480.822) v1(1036.701,480.822) v1(1041.278,480.822) v1(1045.977,480.822) v1(1050.549,480.822) v1(1055.116,480.822) v1(1059.693,480.822) v1(1064.392,480.822) v1(1068.964,480.822) v1(1073.531,480.822) v1(1078.108,480.822) v1(1082.807,480.822) v1(1087.379,480.822) v1(1092.073,480.822) v1(1096.65,480.822) v1(1101.349,480.822) v1(1105.921,480.822) v1(1110.488,480.822) v1(1115.065,480.822) v1(1119.764,480.822) v1(1124.336,480.822) v1(1128.903,480.822) v1(1133.48,480.822) v1(1138.179,480.822) v1(1142.751,480.822) v1(1147.318,480.822) v1(1151.895,480.822) v1(1156.594,480.822) v1(1161.166,480.822) v1(1165.733,480.822) v1(1170.31,480.822) v1(1175.009,480.822) v1(1179.581,480.822) v1(1184.148,480.822) v1(1188.725,480.822) v1(1193.424,480.822) v1(1197.996,480.822) v1(1202.563,480.822) v1(1207.14,480.822) v1(1211.839,480.822) v1(1216.411,480.822) v1(1220.978,480.822) v1(1225.555,480.822) v1(1230.254,480.822) v1(1234.826,480.822) v1(1239.52,480.822) v1(1244.097,480.822) v1(1248.796,480.822) v1(1253.368,480.822) v1(1257.935,480.822) v1(1262.512,480.822) v1(1267.211,480.822) v1(1271.783,480.822) v1(1276.35,480.822) v1(1280.927,480.822) v1(1285.626,480.822) v1(1290.198,480.822) v1(1294.765,480.822) v1(1299.342,480.822) v1(1304.041,480.822) v1(1308.613,480.822)
AOD12: *1.77 *14.1 | length 780
  Top Layer w0.762: v1(1073.531,483.87) 1074.811,482.59 1074.811,440.185 1074.801,440.175 1074.801,439.183 1074.811,439.173 1074.811,436.255 v1(1073.658,435.102) ; v1(1147.318,483.87) 1148.7,482.488 1148.7,436.357 v1(1147.445,435.102) ; v1(1220.978,483.87) 1222.36,482.488 1222.36,436.357 v1(1221.105,435.102) ; v1(1294.765,483.87) 1296.147,482.488 1296.147,436.357 v1(1294.892,435.102)
  MidLayer1 w0.762: v1(1018.286,483.87) v1(1022.863,483.87) v1(1027.562,483.87) v1(1032.134,483.87) v1(1036.701,483.87) v1(1041.278,483.87) v1(1045.977,483.87) v1(1050.549,483.87) v1(1055.116,483.87) v1(1059.693,483.87) v1(1064.392,483.87) v1(1068.964,483.87) v1(1073.531,483.87) v1(1078.108,483.87) v1(1082.807,483.87) v1(1087.379,483.87) v1(1092.073,483.87) v1(1096.65,483.87) v1(1101.349,483.87) v1(1105.921,483.87) v1(1110.488,483.87) v1(1115.065,483.87) v1(1119.764,483.87) v1(1124.336,483.87) v1(1128.903,483.87) v1(1133.48,483.87) v1(1138.179,483.87) v1(1142.751,483.87) v1(1147.318,483.87) v1(1151.895,483.87) v1(1156.594,483.87) v1(1161.166,483.87) v1(1165.733,483.87) v1(1170.31,483.87) v1(1175.009,483.87) v1(1179.581,483.87) v1(1184.148,483.87) v1(1188.725,483.87) v1(1193.424,483.87) v1(1197.996,483.87) v1(1202.563,483.87) v1(1207.14,483.87) v1(1211.839,483.87) v1(1216.411,483.87) v1(1220.978,483.87) v1(1225.555,483.87) v1(1230.254,483.87) v1(1234.826,483.87) v1(1239.52,483.87) v1(1244.097,483.87) v1(1248.796,483.87) v1(1253.368,483.87) v1(1257.935,483.87) v1(1262.512,483.87) v1(1267.211,483.87) v1(1271.783,483.87) v1(1276.35,483.87) v1(1280.927,483.87) v1(1285.626,483.87) v1(1290.198,483.87) v1(1294.765,483.87) v1(1299.342,483.87) v1(1304.041,483.87) v1(1308.613,483.87) ; v1(1018.413,435.102) v1(1022.99,435.102) v1(1027.689,435.102) v2(1032.261,435.102) v1(1036.828,435.102) v1(1041.405,435.102) v1(1046.104,435.102) v1(1050.676,435.102) v1(1055.243,435.102) v1(1059.82,435.102) v1(1064.519,435.102) v1(1069.091,435.102) v1(1073.658,435.102) v1(1078.235,435.102) v1(1082.934,435.102) v1(1087.506,435.102) v1(1092.2,435.102) v1(1096.777,435.102) v1(1101.476,435.102) v1(1106.048,435.102) v1(1110.615,435.102) v1(1115.192,435.102) v1(1119.891,435.102) v1(1124.463,435.102) v1(1129.03,435.102) v1(1133.607,435.102) v1(1138.306,435.102) v1(1142.878,435.102) v1(1147.445,435.102) v1(1152.022,435.102) v1(1156.721,435.102) v1(1161.293,435.102) v1(1165.86,435.102) v1(1170.437,435.102) v1(1175.136,435.102) v1(1179.708,435.102) v1(1184.275,435.102) v1(1188.852,435.102) v1(1193.551,435.102) v1(1198.123,435.102) v1(1202.69,435.102) v1(1207.267,435.102) v1(1211.966,435.102) v1(1216.538,435.102) v1(1221.105,435.102) v1(1225.682,435.102) v1(1230.381,435.102) v1(1234.953,435.102) v1(1239.647,435.102) v1(1244.224,435.102) v1(1248.923,435.102) v1(1253.495,435.102) v1(1258.062,435.102) v1(1262.639,435.102) v1(1267.338,435.102) v1(1271.91,435.102) v1(1276.477,435.102) v1(1281.054,435.102) v1(1285.753,435.102) v1(1290.325,435.102) v1(1294.892,435.102) v1(1299.469,435.102) v1(1304.168,435.102) v1(1308.74,435.102)
AOD13: *1.78 *15.1 | length 780.2
  Top Layer w0.762: v1(1078.108,438.15) 1079.5,439.542 1079.5,485.526 v1(1078.108,486.918) ; v1(1151.895,438.15) 1153.287,439.542 1153.287,485.526 v1(1151.895,486.918) ; v1(1225.555,438.15) 1226.947,439.542 1226.947,485.526 v1(1225.555,486.918) ; v1(1299.342,438.15) 1300.617,439.425 1300.617,485.643 v1(1299.342,486.918)
  MidLayer1 w0.762: v2(1018.286,438.15) v1(1022.863,438.15) v1(1027.562,438.15) v1(1032.134,438.15) v1(1036.701,438.15) v1(1041.278,438.15) v1(1045.977,438.15) v1(1050.549,438.15) v1(1055.116,438.15) v1(1059.693,438.15) v1(1064.392,438.15) v1(1068.964,438.15) v1(1073.531,438.15) v1(1078.108,438.15) v1(1082.807,438.15) v1(1087.379,438.15) v1(1092.073,438.15) v1(1096.65,438.15) v1(1101.349,438.15) v1(1105.921,438.15) v1(1110.488,438.15) v1(1115.065,438.15) v1(1119.764,438.15) v1(1124.336,438.15) v1(1128.903,438.15) v1(1133.48,438.15) v1(1138.179,438.15) v1(1142.751,438.15) v1(1147.318,438.15) v1(1151.895,438.15) v1(1156.594,438.15) v1(1161.166,438.15) v1(1165.733,438.15) v1(1170.31,438.15) v1(1175.009,438.15) v1(1179.581,438.15) v1(1184.148,438.15) v1(1188.725,438.15) v1(1193.424,438.15) v1(1197.996,438.15) v1(1202.563,438.15) v1(1207.14,438.15) v1(1211.839,438.15) v1(1216.411,438.15) v1(1220.978,438.15) v1(1225.555,438.15) v1(1230.254,438.15) v1(1234.826,438.15) v1(1239.52,438.15) v1(1244.097,438.15) v1(1248.796,438.15) v1(1253.368,438.15) v1(1257.935,438.15) v1(1262.512,438.15) v1(1267.211,438.15) v1(1271.783,438.15) v1(1276.35,438.15) v1(1280.927,438.15) v1(1285.626,438.15) v1(1290.198,438.15) v1(1294.765,438.15) v1(1299.342,438.15) v1(1304.041,438.15) v1(1308.613,438.15) ; v1(1018.286,486.918) v1(1022.863,486.918) v1(1027.562,486.918) v1(1032.134,486.918) v1(1036.701,486.918) v1(1041.278,486.918) v1(1045.977,486.918) v1(1050.549,486.918) v1(1055.116,486.918) v1(1059.693,486.918) v1(1064.392,486.918) v1(1068.964,486.918) v1(1073.531,486.918) v1(1078.108,486.918) v1(1082.807,486.918) v1(1087.379,486.918) v1(1092.073,486.918) v1(1096.65,486.918) v1(1101.349,486.918) v1(1105.921,486.918) v1(1110.488,486.918) v1(1115.065,486.918) v1(1119.764,486.918) v1(1124.336,486.918) v1(1128.903,486.918) v1(1133.48,486.918) v1(1138.179,486.918) v1(1142.751,486.918) v1(1147.318,486.918) v1(1151.895,486.918) v1(1156.594,486.918) v1(1161.166,486.918) v1(1165.733,486.918) v1(1170.31,486.918) v1(1175.009,486.918) v1(1179.581,486.918) v1(1184.148,486.918) v1(1188.725,486.918) v1(1193.424,486.918) v1(1197.996,486.918) v1(1202.563,486.918) v1(1207.14,486.918) v1(1211.839,486.918) v1(1216.411,486.918) v1(1220.978,486.918) v1(1225.555,486.918) v1(1230.254,486.918) v1(1234.826,486.918) v1(1239.52,486.918) v1(1244.097,486.918) v1(1248.796,486.918) v1(1253.368,486.918) v1(1257.935,486.918) v1(1262.512,486.918) v1(1267.211,486.918) v1(1271.783,486.918) v1(1276.35,486.918) v1(1280.927,486.918) v1(1285.626,486.918) v1(1290.198,486.918) v1(1294.765,486.918) v1(1299.342,486.918) v1(1304.041,486.918) v1(1308.613,486.918)
AOD14: *1.79 *16.1 | length 780.1
  Top Layer w0.762: v1(1082.807,441.198) 1084.082,442.473 1084.082,488.691 v1(1082.807,489.966) ; v1(1156.594,441.198) 1157.971,442.575 1157.971,488.589 v1(1156.594,489.966) ; v1(1230.254,441.198) 1231.631,442.575 1231.631,488.589 v1(1230.254,489.966) ; v1(1304.041,441.198) 1305.316,442.473 1305.316,488.691 v1(1304.041,489.966)
  MidLayer1 w0.762: v1(1018.286,441.198) v1(1022.863,441.198) v1(1027.562,441.198) v2(1032.134,441.198) v1(1036.701,441.198) v1(1041.278,441.198) v1(1045.977,441.198) v1(1050.549,441.198) v1(1055.116,441.198) v1(1059.693,441.198) v1(1064.392,441.198) v1(1068.964,441.198) v1(1073.531,441.198) v1(1078.108,441.198) v1(1082.807,441.198) v1(1087.379,441.198) v1(1092.073,441.198) v1(1096.65,441.198) v1(1101.349,441.198) v1(1105.921,441.198) v1(1110.488,441.198) v1(1115.065,441.198) v1(1119.764,441.198) v1(1124.336,441.198) v1(1128.903,441.198) v1(1133.48,441.198) v1(1138.179,441.198) v1(1142.751,441.198) v1(1147.318,441.198) v1(1151.895,441.198) v1(1156.594,441.198) v1(1161.166,441.198) v1(1165.733,441.198) v1(1170.31,441.198) v1(1175.009,441.198) v1(1179.581,441.198) v1(1184.148,441.198) v1(1188.725,441.198) v1(1193.424,441.198) v1(1197.996,441.198) v1(1202.563,441.198) v1(1207.14,441.198) v1(1211.839,441.198) v1(1216.411,441.198) v1(1220.978,441.198) v1(1225.555,441.198) v1(1230.254,441.198) v1(1234.826,441.198) v1(1239.52,441.198) v1(1244.097,441.198) v1(1248.796,441.198) v1(1253.368,441.198) v1(1257.935,441.198) v1(1262.512,441.198) v1(1267.211,441.198) v1(1271.783,441.198) v1(1276.35,441.198) v1(1280.927,441.198) v1(1285.626,441.198) v1(1290.198,441.198) v1(1294.765,441.198) v1(1299.342,441.198) v1(1304.041,441.198) v1(1308.613,441.198) ; v1(1018.286,489.966) v1(1022.863,489.966) v1(1027.562,489.966) v1(1032.134,489.966) v1(1036.701,489.966) v1(1041.278,489.966) v1(1045.977,489.966) v1(1050.549,489.966) v1(1055.116,489.966) v1(1059.693,489.966) v1(1064.392,489.966) v1(1068.964,489.966) v1(1073.531,489.966) v1(1078.108,489.966) v1(1082.807,489.966) v1(1087.379,489.966) v1(1092.073,489.966) v1(1096.65,489.966) v1(1101.349,489.966) v1(1105.921,489.966) v1(1110.488,489.966) v1(1115.065,489.966) v1(1119.764,489.966) v1(1124.336,489.966) v1(1128.903,489.966) v1(1133.48,489.966) v1(1138.179,489.966) v1(1142.751,489.966) v1(1147.318,489.966) v1(1151.895,489.966) v1(1156.594,489.966) v1(1161.166,489.966) v1(1165.733,489.966) v1(1170.31,489.966) v1(1175.009,489.966) v1(1179.581,489.966) v1(1184.148,489.966) v1(1188.725,489.966) v1(1193.424,489.966) v1(1197.996,489.966) v1(1202.563,489.966) v1(1207.14,489.966) v1(1211.839,489.966) v1(1216.411,489.966) v1(1220.978,489.966) v1(1225.555,489.966) v1(1230.254,489.966) v1(1234.826,489.966) v1(1239.52,489.966) v1(1244.097,489.966) v1(1248.796,489.966) v1(1253.368,489.966) v1(1257.935,489.966) v1(1262.512,489.966) v1(1267.211,489.966) v1(1271.783,489.966) v1(1276.35,489.966) v1(1280.927,489.966) v1(1285.626,489.966) v1(1290.198,489.966) v1(1294.765,489.966) v1(1299.342,489.966) v1(1304.041,489.966) v1(1308.613,489.966)